# EAGLE board pcb (EAGLE 7.5.0)

Size 74 x 40 mm. Coordinates in mm from the lower left corner, seen from the top.
Copper layers (1*16): Top 0.035mm / dielectric 1.5mm / Bottom 0.035mm
Design rules "default": minimum track width 10mil, minimum drill 24mil, track to track 8mil, track to pad 8mil, pad to pad 8mil, via to via 8mil, smd to smd 8mil, copper to edge 40mil, drill to drill 8mil, minimum pad ring 10mil, minimum via ring 8mil, stop-mask expansion 4mil, vias tented up to drill 0mil, thermal gap 10mil

## Footprints (pad centres in the part's own frame; a part is rotated, then mirrored left to right if it is on the bottom)
0402-CAP = smd 0.7 x 0.9: 1 -0.65,0; 2 0.65,0
0603-RES = smd 1.1 x 1: 1 -0.85,0; 2 0.85,0
MICRO-SD-SOCKET-PP = smd 0.8 x 1.5: 1 -8.94,10.7; 2 -7.84,10.3; 3 -6.74,10.7; 4 -5.64,10.9; 5 -4.54,10.7; 6 -3.44,10.9; 7 -2.34,10.7; 8 -1.24,10.7 | smd 1.8 x 1.4: CD1 -7.75,0.4; CD2 -2.05,0.4 | smd 1.4 x 1.9: GND1 -13.6,14.55; GND2 -0.45,13.55
FUTURA_V1.0_MOTOT_MOUNT = drill 0.95 pad 2: L_CHA -20.375,26.73; L_CHB -20.375,24.19; L_GND -20.375,45.27; L_MOTOR_A -2,37.27; L_MOTOR_B -2,34.73; L_VCC -20.375,47.81; R_CHA 20.375,45.27; R_CHB 20.375,47.81; R_GND 20.375,26.73; R_MOTOR_A 2,34.73; R_MOTOR_B 2,37.27; R_VCC 20.375,24.19 | hole 2.286: 14.85,45; 14.85,27; -14.85,27; -14.85,45
STM32F405/415_LQFP64 = smd 1.2 x 0.3: BOOT0 -5.75,-1.75; PA3 5.75,-3.75; PA4 5.75,-2.25; PA5 5.75,-1.75; PA6 5.75,-1.25; PA7 5.75,-0.75; PA14 -5.75,3.75; PA15 -5.75,3.25; PB0 5.75,0.75; PB1 5.75,1.25; PB2 5.75,1.75; PB3 -5.75,0.75; PB4 -5.75,0.25; PB5 -5.75,-0.25; PB6 -5.75,-0.75; PB7 -5.75,-1.25; PB8 -5.75,-2.25; PB9 -5.75,-2.75; PB10 5.75,2.25; PB11 5.75,2.75; PC4 5.75,-0.25; PC5 5.75,0.25; PC10 -5.75,2.75; PC11 -5.75,2.25; PC12 -5.75,1.75; PD2 -5.75,1.25; VCAP_1 5.75,3.25; VDD_0 5.75,-2.75; VDD_1 5.75,3.75; VDD_3 -5.75,-3.75; VSS_0 5.75,-3.25; VSS_1 -5.75,-3.25 | smd 0.3 x 1.2: NRST -0.75,-5.75; PA0_WKUP 2.75,-5.75; PA1 3.25,-5.75; PA2 3.75,-5.75; PA8 -0.25,5.75; PA9 -0.75,5.75; PA10 -1.25,5.75; PA11 -1.75,5.75; PA12 -2.25,5.75; PA13 -2.75,5.75; PB12 3.75,5.75; PB13 3.25,5.75; PB14 2.75,5.75; PB15 2.25,5.75; PC0 -0.25,-5.75; PC1 0.25,-5.75; PC2 0.75,-5.75; PC3 1.25,-5.75; PC6 1.75,5.75; PC7 1.25,5.75; PC8 0.75,5.75; PC9 0.25,5.75; PC13 -3.25,-5.75; PC14 -2.75,-5.75; PC15 -2.25,-5.75; PH0 -1.75,-5.75; PH1 -1.25,-5.75; VBAT -3.75,-5.75; VCAP_2 -3.25,5.75; VDD_2 -3.75,5.75; VDDA 2.25,-5.75; VSSA 1.75,-5.75
TPS76850(SOIC-8) = smd 0.55 x 1.5: EN(BAR) -0.635,-2.7; FB/NC -0.635,2.7; GND -1.905,-2.7; IN1 0.635,-2.7; IN2 1.905,-2.7; OUT1 0.635,2.7; OUT2 1.905,2.7; PG -1.905,2.7
TPS73633(SOT-23) = smd 0.55 x 1: EN 0.95,-1.35; GND 0,-1.35; IN -0.95,-1.35; NR/FB 0.95,1.35; OUT -0.95,1.35
JST_CONNECTOR_FEMALE = drill 0.889: + 0,1; - 0,-1
TS02_SWITCH = drill 0.8: PIN1 0,2.54; PIN2 0,0; PIN3 0,-2.54
HCMS-2903 = drill 0.762 pad 1.422: BLANK 3.81,3.81; CE 6.35,3.81; CLK 6.35,-3.81; DATA_IN 1.27,-3.81; DATA_OUT -6.35,-3.81; GND 1.27,3.81; OSC -3.81,-3.81; RESET -6.35,3.81; RS 3.81,-3.81; SEL -1.27,3.81; V_LED -1.27,-3.81; V_LOGIC -3.81,3.81

## Placement (x,y rotation side)
C1  2.2uF  [0402-CAP]  38.7,-2.84 0 top
C2  0.1uF  [0402-CAP]  34.89,-2.84 0 top
C3  0.1uF  [0402-CAP]  31.08,-2.84 0 top
C4  4.7uF  [0402-CAP]  27.27,-2.84 0 top
C5  4.7uF  [0402-CAP]  23.46,-2.84 0 top
C6  0.1uF  [0402-CAP]  19.65,-2.84 0 top
C7  0.1uF  [0402-CAP]  15.84,-2.84 0 top
C8  2.2uF  [0402-CAP]  12.03,-2.84 0 top
C9  0.1uF  [0402-CAP]  103.47,11.13 0 top  (outside the outline)
R_BOOT1  47K  [0603-RES]  42.51,-2.84 0 top
U1  USD-SOCKETSMD  [MICRO-SD-SOCKET-PP]  -0.57,-22.81 0 top  (outside the outline)
U$1  FUTURA_V1.0_MOTOR_MOUNT  [FUTURA_V1.0_MOTOT_MOUNT]  37,-16 0 top
U$2  STM32F405/415_LQFP64  [STM32F405/415_LQFP64]  36.9,37.37 0 top
U$3  TPS76850(SOIC-8)  [TPS76850(SOIC-8)]  97.22,24.67 0 top  (outside the outline)
U$4  TPS73633(SOT-23)  [TPS73633(SOT-23)]  55.49,61.29 0 top  (outside the outline)
U$5  JST_CONNECTOR_FEMALE  [JST_CONNECTOR_FEMALE]  67.53,60.99 0 top  (outside the outline)
U$6  TS02_SWITCH  [TS02_SWITCH]  101.21,39.83 0 top  (outside the outline)
U$7  HCMS-2903  [HCMS-2903]  58.84,-5.97 0 top

## Library data of the parts
C1-C9 R_BOOT1 U1 = SparkFun
U$1 = Futura 1.0 motor mount template
U$2 = STM32F10x F4xx
U$3 = TPS76850(SOIC-8)
U$4 = TPS73633(SOT-23)
U$5 = JST_CONNECTOR_FEMALE. through hole
U$6 = 2.54mm slide switch
U$7 = HCMS-2903

## Nets
3.3V: C2.1 C3.1 C4.1 C7.2 C9.1 U$2.VBAT U$2.VDD_0 U$2.VDD_1 U$2.VDD_2 U$2.VDD_3
AGND: C5.2 C6.2 U$2.VSSA
BOOT1: R_BOOT1.2
GND: C1.2 C2.2 C3.2 C4.2 C7.1 C8.1 C9.2 U$2.VSS_0 U$2.VSS_1
N$2: C1.1 U$2.VCAP_2
N$3: U$2.PB9
N$4: U$2.PB8
N$7: U$2.BOOT0
N$8: U$2.PB7
N$9: U$2.PB6
N$10: U$2.PB5
N$11: U$2.PB4
N$12: U$2.PB3
N$13: U$2.PD2
N$14: U$2.PC12
N$15: U$2.PC11
N$16: U$2.PC10
N$17: U$2.PA15
N$18: U$2.PA14
N$21: U$2.PA13
N$22: U$2.PA12
N$23: U$2.PA11
N$24: U$2.PA10
N$25: U$2.PA9
N$26: U$2.PA8
N$27: U$2.PC9
N$28: U$2.PC8
N$29: U$2.PC7
N$30: U$2.PC6
N$31: U$2.PB15
N$32: U$2.PB14
N$33: U$2.PB13
N$34: U$2.PB12
N$36: C8.2 U$2.VCAP_1
N$37: U$2.PB11
N$38: R_BOOT1.1 U$2.PB10
N$39: U$2.PB2
N$40: U$2.PB1
N$41: U$2.PB0
N$42: U$2.PC5
N$43: U$2.PC4
N$44: U$2.PA7
N$45: U$2.PA6
N$46: U$2.PA5
N$47: U$2.PA4
N$53: U$2.PA0_WKUP
N$56: U$2.PC3
N$57: U$2.PC2
N$58: U$2.PC1
N$59: U$2.PC0
N$60: U$2.NRST
N$61: U$2.PH1
N$62: U$2.PH0
N$63: U$2.PC15
N$64: U$2.PC14
N$65: U$2.PC13
VA3.3: C5.1 C6.1 U$2.VDDA

## Tracks (layer width: path | path; a pad name or v marks a point on that pad's centre or on a via)
3.3V  (9 unrouted)
AGND  (2 unrouted)
GND  (8 unrouted)
N$2  (1 unrouted)
N$36  (1 unrouted)
N$38  (1 unrouted)
VA3.3  (2 unrouted)